# Altium PCB Adapter.PcbDoc
Units mm, origin at the board's own origin, x right, y up, seen from the top; angles counter-clockwise.
Board outline 70 x 70 mm, 2 copper layers (Top Layer, Bottom Layer), stack 0.325 mm thick; 22 components, 21 nets, 126 pads, 0 vias.
Unrouted connection lines stored in the file: 13.
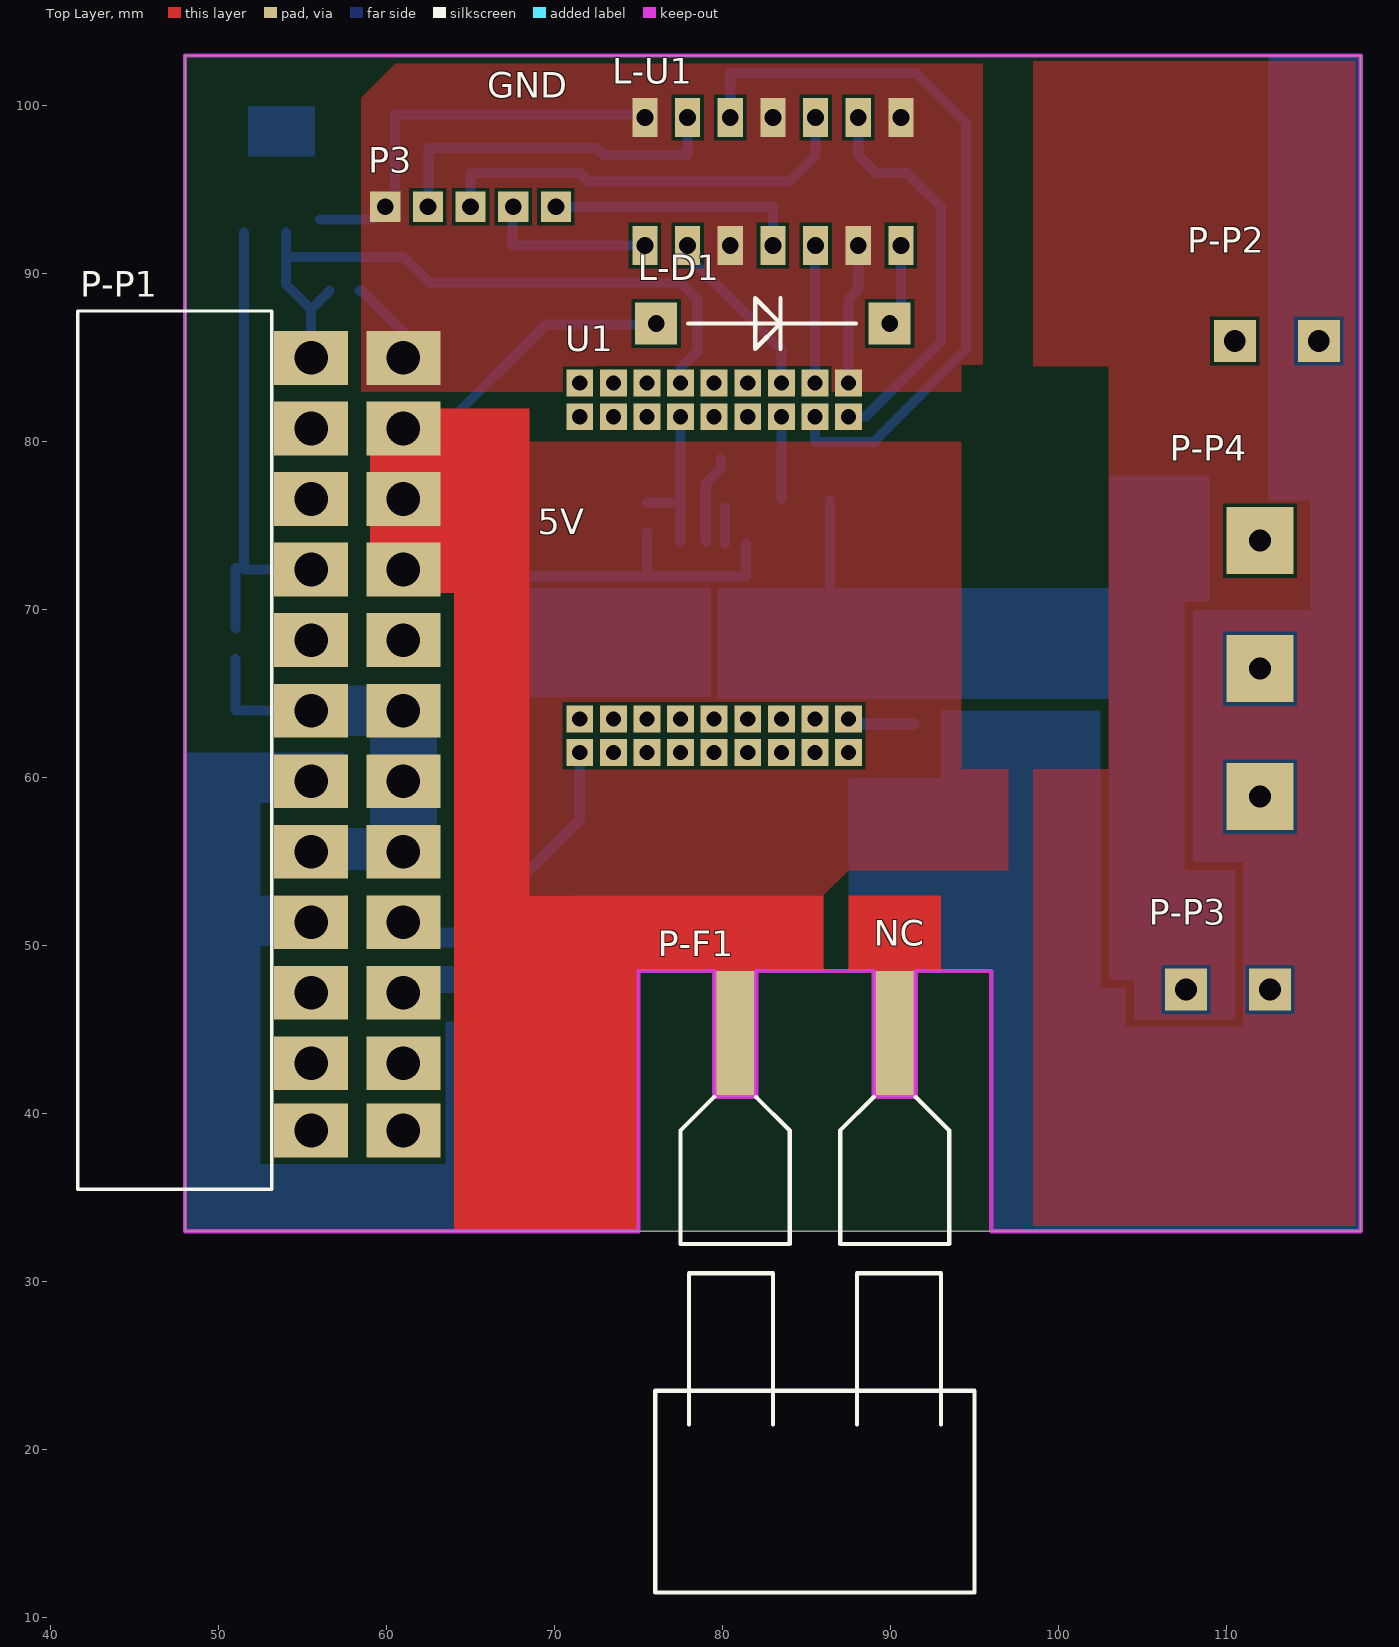
[diagram p0: Top Layer view]
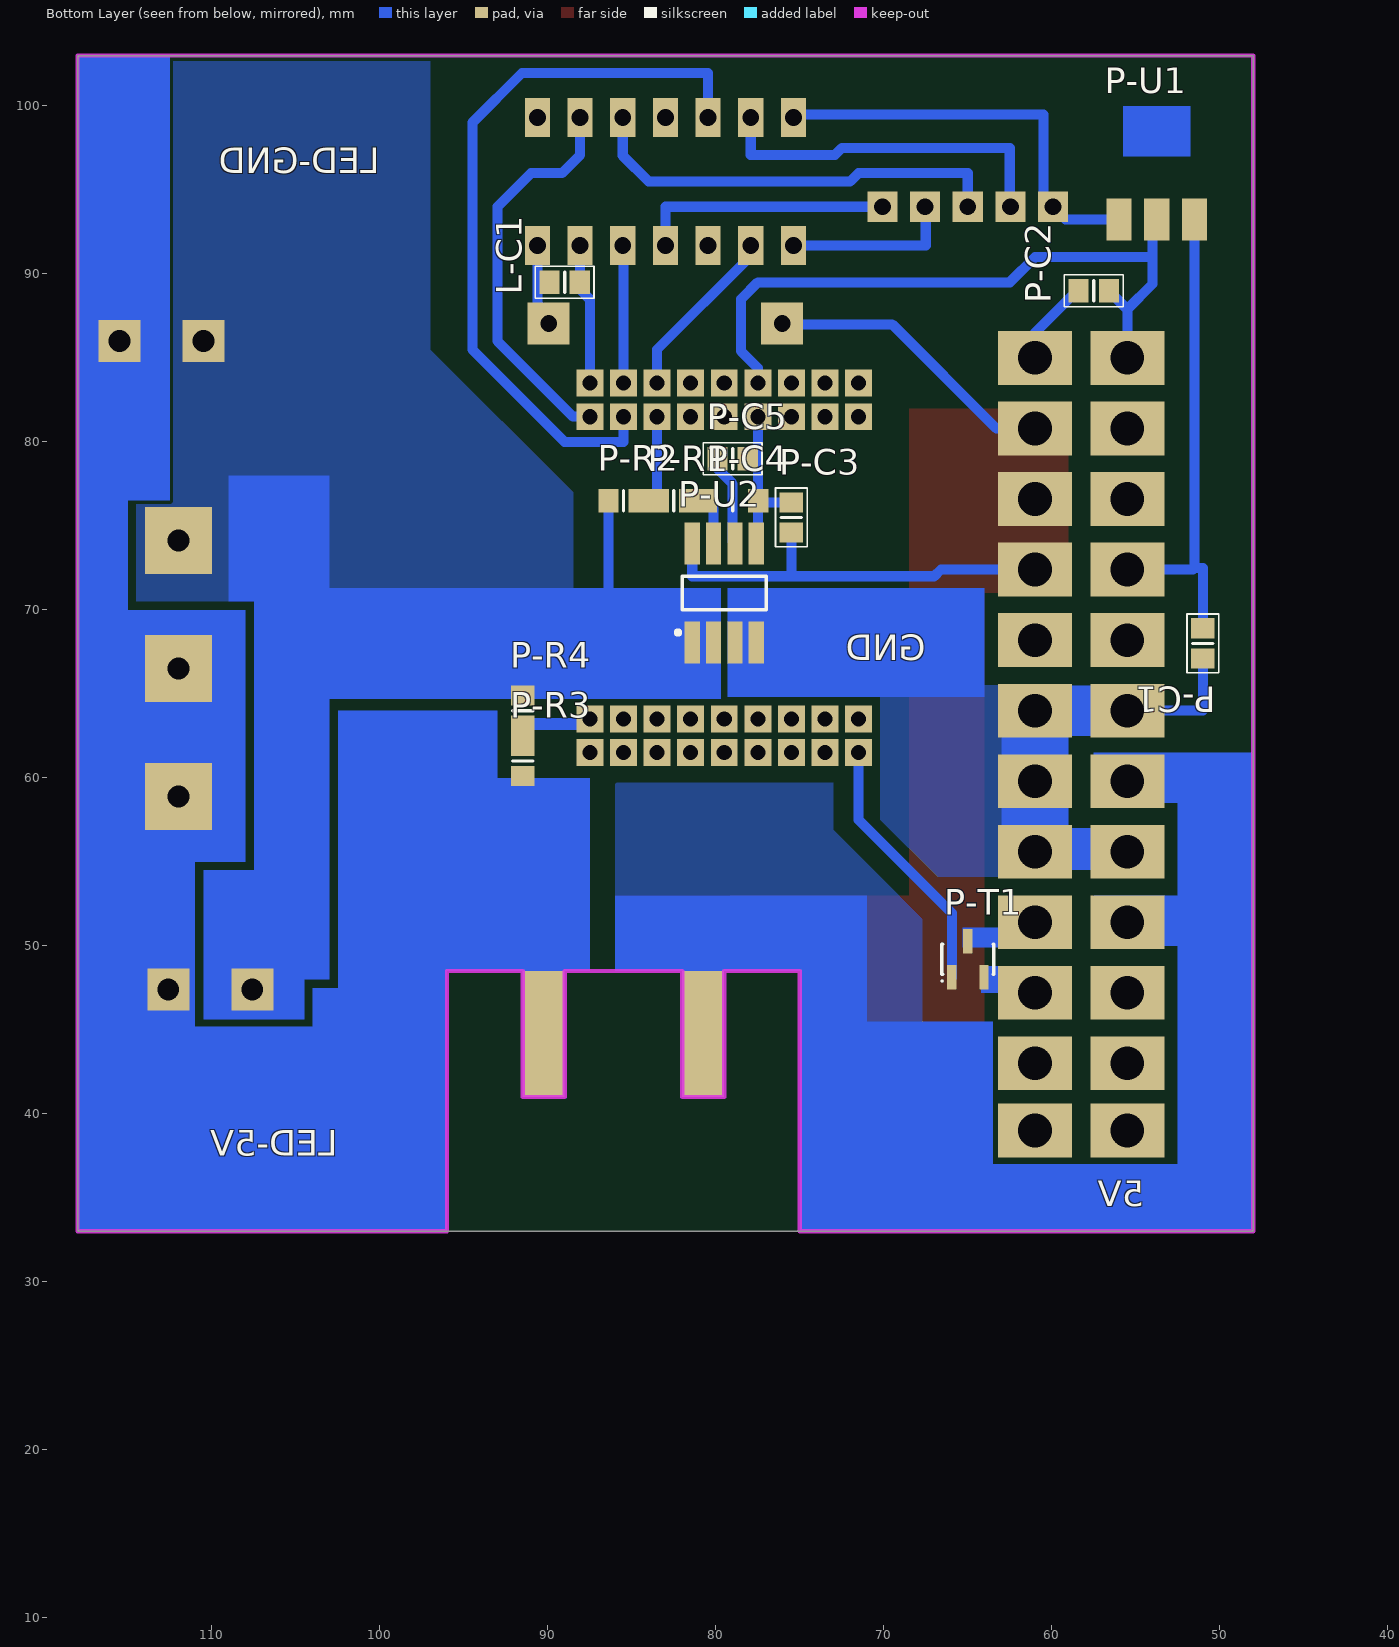
[diagram p1: Bottom Layer view, seen from below]
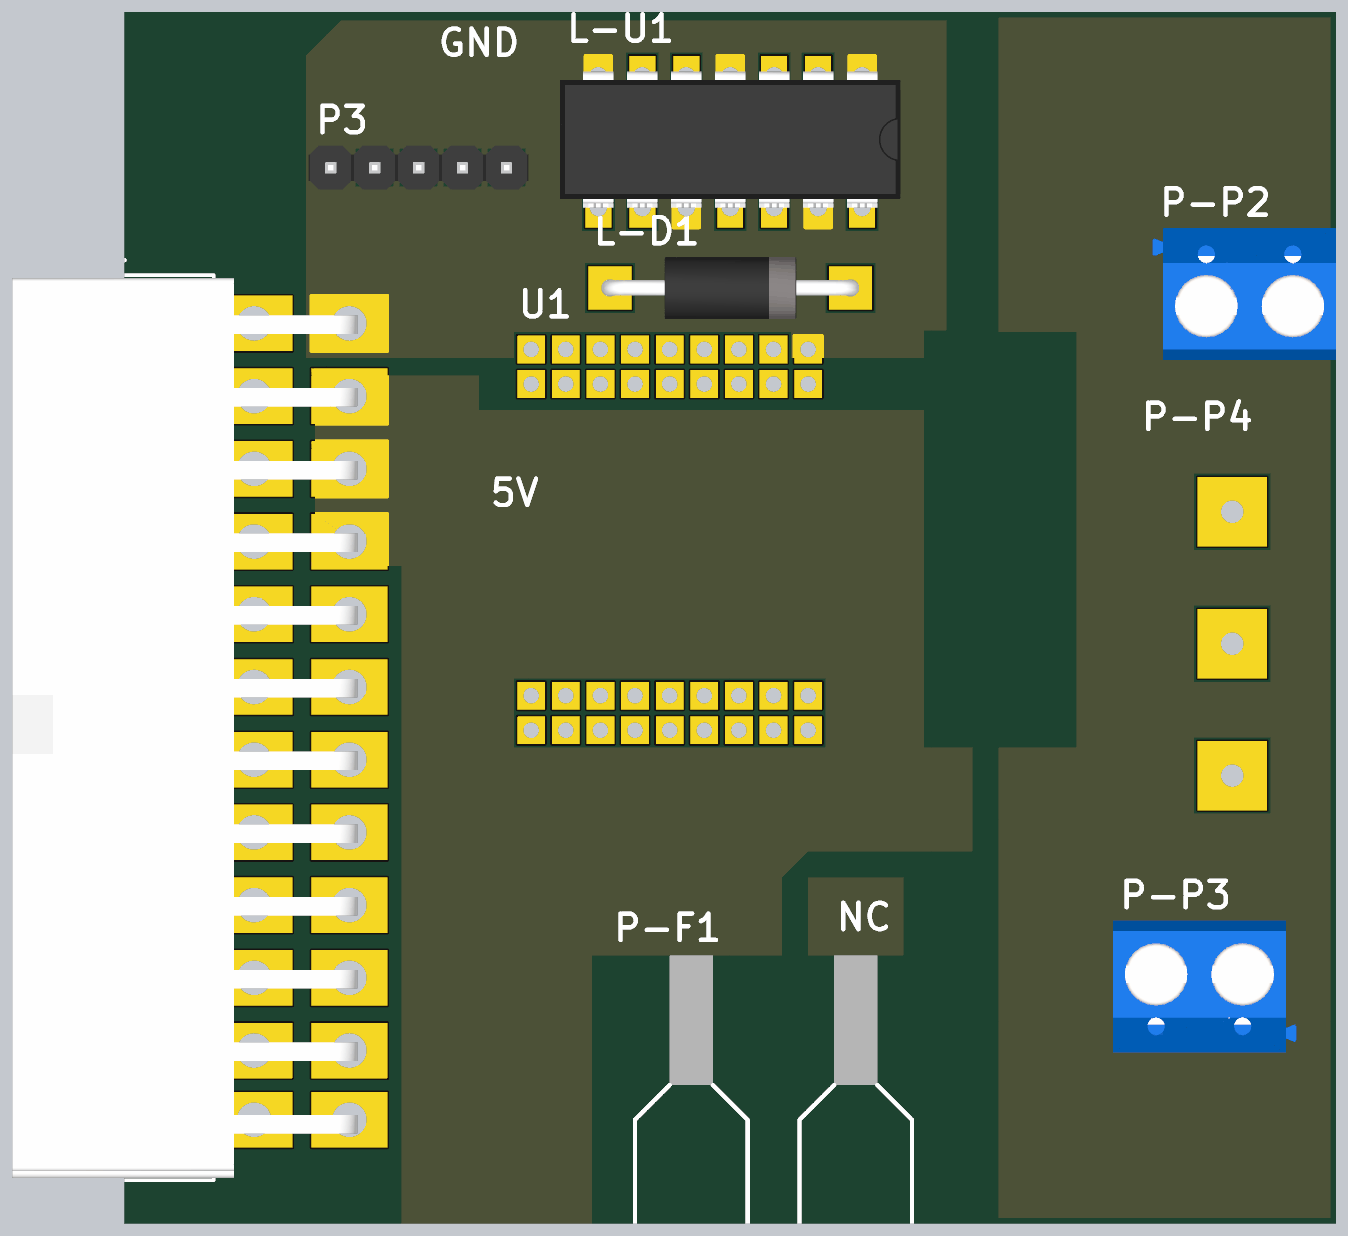
[diagram p2: 3D render of the assembled board from above, using the file's embedded part models]
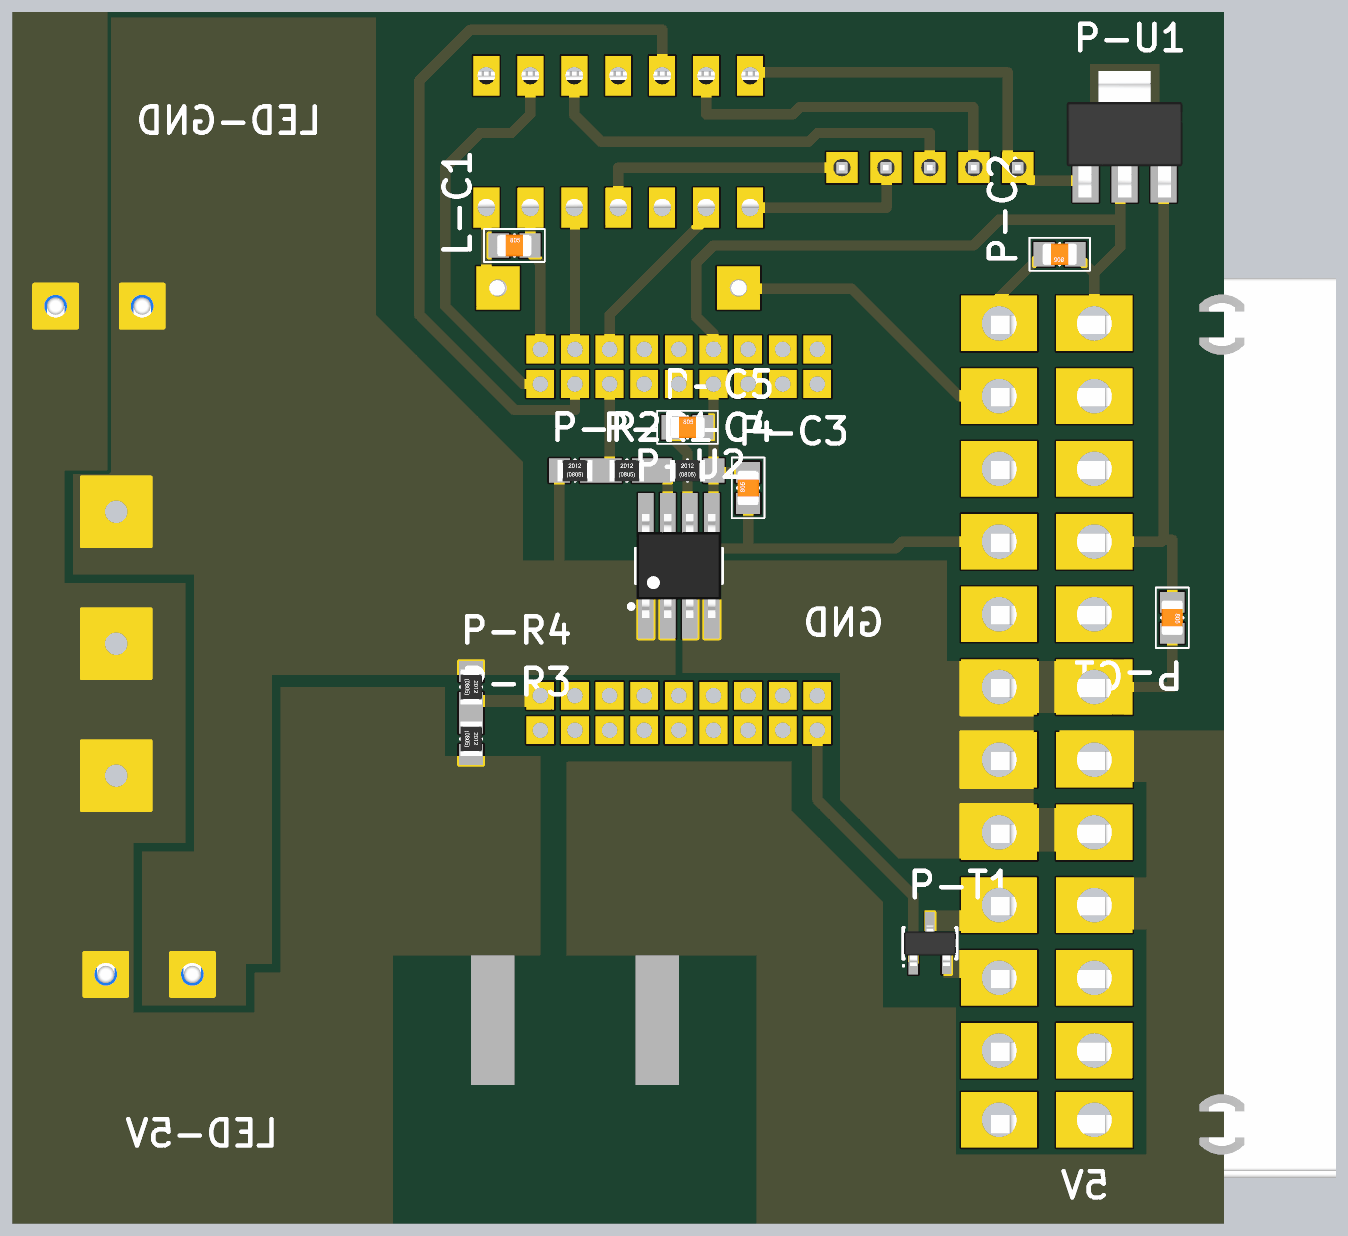
[diagram p3: 3D render of the assembled board from below, using the file's embedded part models]

## Layer stack, top to bottom
Top Layer: signal copper 0.0356
Dielectric 1: core 0.254, FR-4, Dk 4.2
Bottom Layer: signal copper 0.0356

## Board outline
48,33 118,33 118,103 48,103

## Design rules (kind name [scope] priority, off if disabled: settings)
Clearance [All] p1: gap=0.2
PolygonConnect [All] p1: connectstyle=Direct reliefconductorwidth=0.254 reliefentries=4 polygonreliefangle="90 Angle" airgapwidth=0.254
RoutingVias [All] p1: holewidth=0.711 width=1.27 viastyle="Through Hole" minholewidth=0.711 minwidth=1.27 maxholewidth=0.711 maxwidth=1.27
SolderMaskExpansion [All] p1: expansion=0.102
Width [All] p1: maxlimit=2 minlimit=0.2 preferedwidth=0.6
30 further rules are at their usual default settings.

## Classes and differential pairs
component class Top: P3 U1
component class M1: L-C1 L-D1 L-U1
component class P2: P-C1 P-C2 P-C3 P-C4 P-C5 P-F1 P-P1 P-P2 P-P3 P-P4 P-R1 P-R2 P-R3 P-R4 P-T1 P-U1 P-U2 PS-T2

## Components (designator, comment, footprint, x,y, rotation, side; value= is the part's Value field where it differs from the comment)
L-C1 "100nF" "C 0805 / 2012" 89,89.5 r180 bottom
L-D1 "Diode" DO-41 83.5,87 r180 top
L-U1 "SN74LS125" DIP-14 83,95.5 r0 top
P3 "Header 1x5" "Header 1x5 male" 65,94 r180 top
P-C1 "1uF" "C 0805 / 2012" 51,68 r270 bottom
P-C2 "1uF" "C 0805 / 2012" 57.5,89 r0 bottom
P-C3 "1uF" "C 0805 / 2012" 75.5,75.5 r90 bottom
P-C4 "10nF" "R 0805 / 2012 wide" 79,76.5 r180 bottom
P-C5 "10nF" "C 0805 / 2012" 79,79 r180 bottom
P-F1 "Blade fuse" "BLADE FUSE RECEPTACLE" 85.5,48.5 r180 top
P-P1 "ATX" ATX 55.5,85 r270 top
P-P2 "Header 2x1" "Screw terminal 2 pin RM 5mm" 110.5,86 r0 top
P-P3 "Header 2x1" "Screw terminal 2 pin RM 5mm" 112.6,47.4 r180 top
P-P4 "Header 1x3" "Screw terminal 3 pin RM 7.62mm" 112,66.5 r90 top
P-R1 "?R" "R 0805 / 2012" 82.5,76.5 r180 bottom
P-R2 "?R" "R 0805 / 2012" 85.5,76.5 r180 bottom
P-R3 "?R" "R 0805 / 2012" 91.5,61 r270 bottom
P-R4 "?R" "R 0805 / 2012" 91.5,64 r270 bottom
P-T1 "2N7002" SOT-23-3 65,49.2 r180 bottom
P-U1 "AMS1117-3V3" SOT-223-3 57,92.5 r180 bottom
P-U2 "Allegro ACS712-30A" SOIC-8 79.5,71 r90 bottom
U1 "Core51822" Core51822 70.5,84.5 r270 top

## Footprints (in the part's own frame and the unit in brackets; to place one, negate y for a bottom-side part, rotate by r counter-clockwise, add the part's x,y. Pads: shape width x height; smd on the part's side, far side on the other; paste and mask are expansions set on the pad)
ATX [mm] "Molex MINI-FIT JR. 24-polig"
  rect 3.2x4.4 hole 2 paste+0: 1(46,0) 2(42,0) 3(37.8,0) 4(33.6,0) 5(29.4,0) 6(25.2,0) 7(21,0) 8(16.8,0) 9(12.6,0) 10(8.4,0) 11(4.2,0) 12(0,0) 13(46,5.5) 14(42,5.5) 15(37.8,5.5) 16(33.6,5.5) 17(29.4,5.5) 18(25.2,5.5) 19(21,5.5) 20(16.8,5.5) 21(12.6,5.5) 22(8.4,5.5) 23(4.2,5.5) 24(0,5.5)
  silkscreen extent -2.79,-13.9 49.5,-2.34, body extent -2.63,-13.97 49.37,5.96, height 12.4
"BLADE FUSE RECEPTACLE" [mm]
  rect 2.5x7.5 smd mask+0: 1(-4.75,3.75) 2(4.75,3.75)
  rect 2.5x7.5 smd far side mask+0: 1(-4.75,3.75) 2(4.75,3.75)
  Keep-Out Layer lines w0.254: 6,0 6,7.5 3.5,7.5 3.5,0 -3.5,0 -3.5,7.5 -6,7.5 -6,0
  silkscreen extent -9.5,7.5 9.5,37
"C 0805 / 2012" [mm] "Capacitor 0805 / 2012 (2.0 x 1.2 mm)"
  rect 1.2x1.4 smd: 1(-0.9,0) 2(0.9,0)
  silkscreen extent -1.75,-0.95 1.75,0.95, body extent -1,-0.62 1,0.63, height 0.78
Core51822 [mm]
  rect 1.6x1.6 hole 0.9: 1(1,17) 2(3,17) 3(1,15) 4(3,15) 5(1,13) 6(3,13) 7(1,11) 8(3,11) 9(1,9) 10(3,9) 11(1,7) 12(3,7) 13(1,5) 14(3,5) 15(1,3) 16(3,3) 17(1,1) 18(3,1) 19(21,17) 20(23,17) 21(21,15) 22(23,15) 23(21,13) 24(23,13) 25(21,11) 26(23,11) 27(21,9) 28(23,9) 29(21,7) 30(23,7) 31(21,5) 32(23,5) 33(21,3) 34(23,3) 35(21,1) 36(23,1)
DIP-14 [mm]
  rect 1.5x2.3 hole 1: 1(7.62,3.81) 2(5.08,3.81) 3(2.54,3.81) 4(0,3.81) 5(-2.54,3.81) 6(-5.08,3.81) 7(-7.62,3.81) 8(-7.62,-3.81) 9(-5.08,-3.81) 10(-2.54,-3.81) 11(0,-3.81) 12(2.54,-3.81) 13(5.08,-3.81) 14(7.62,-3.81)
  body extent -9.84,-3.81 9.84,4.06, height 5.33
DO-41 [mm]
  rect 2.5x2.5 hole 1: 1(-6.45,-0.05) 2(7.45,-0.05)
  silkscreen extent -4.45,-1.55 5.55,1.45, body extent -6.95,-1.85 7.92,1.75, height 7.99
"Header 1x5 male" [mm] "2.54mm"
  rect 1.8x1.8 hole 1: 1(-5.08,0) 2(-2.54,0) 3(0,0) 4(2.54,0) 5(5.08,0)
  body extent -6.35,-1.27 6.35,1.27, height 8.6
"R 0805 / 2012" [mm] "Resistor 0805 / 2012 (2.0 x 1.2 mm)"
  rect 1.2x1.4 smd: 1(-0.9,0) 2(0.9,0)
  silkscreen extent 0,-0.6 0,0.6, body extent -1,-0.63 1,0.62, height 0.45
"R 0805 / 2012 wide" [mm] "Resistor 0805 / 2012 (2.0 x 1.2 mm)"
  rect 1.2x1.4 smd: 1(-1.524,0) 2(1.524,0)
  silkscreen extent 0,-0.6 0,0.6, body extent -1,-0.63 1,0.62, height 0.45
"Screw terminal 2 pin RM 5mm" [mm] "DG301-5.0-02"
  rect 2.5x2.5 hole 1.3: 1(0,0) 2(5,0)
  body extent -3.1,-3.1 7.5,4.5, height 10
"Screw terminal 3 pin RM 7.62mm" [mm]
  rect 4x4 hole 1.3: 1(-7.62,0) 2(0,0) 3(7.62,0)
SOIC-8 [mm]
  rect 2.5x0.9 smd: 1(-2.95,1.905) 2(-2.95,0.635) 3(-2.95,-0.635) 4(-2.95,-1.905) 5(2.95,-1.905) 6(2.95,-0.635) 7(2.95,0.635) 8(2.95,1.905)
  silkscreen extent -2.47,-2.5 1,2.88, body extent -3,-2.45 3,2.45, height 1.75
SOT-23-3 [mm]
  rect 0.55x1.45 smd: 1(-0.95,-1.075) 2(0.965,-1.067) 3(0,1.067)
  silkscreen extent -1.58,-1.35 1.55,0.9, body extent -1.49,-1.32 1.51,1.28, height 1.1
SOT-223-3 [mm]
  rect 1.5x2.5 smd: 1(1,0.75) 2(3.25,0.75) 3(5.5,0.75)
  Top Layer region: 1.25,7.5 5.25,7.5 5.25,4.5 1.25,4.5
  body extent -0.1,-0.22 6.6,7.08, height 1.8

## Part data
L-C1 P-C1 P-C2 P-C3 P-C4 P-C5: library part Capacitor
L-U1: library part 74xx125, "Quad 3-State Buffers"
P-F1: library part Fuse
P-P1: library part "ATX sorted"
P-R1 P-R2 P-R3 P-R4: library part Resistor
P-T1: "N-FET"
P-U1: library part AMS1117, "LDO 3.3V/5V/12V"
P-U2: library part "Allegro ACS712", "Analog current sensor"

## Nets (pads, with @x,y where several pads share a name; then routed paths per layer and width w, separated by ;. In a path a pad name is that pad's centre, name@x,y a point inside that pad or via, vN(x,y) a via of type N, cw(c..) or ccw(c..) an arc to the next point about the centre after c; other vN are vias at no path point)
3V3: P-C2.1 P-P1.1 P-P1.2 P-P1.12 P-P1.13 P-U1.2 U1.11 | length 40.6
  Bottom Layer w0.6: P-U1.2@54,92.5 54,91 ; P-P1.12 55.5,87.9 ; P-C2.1 55.5,87.9 ; U1.11 77.5,84.4 78.5,85.4 78.5,88.5 77.5,89.5 62.5,89.5 61,91 54,91 ; 54,91 54,89.4 55.5,87.9
4V3: L-C1.1 L-D1.1 L-U1.14 | length 4.3
  Bottom Layer w0.6: L-D1.1@90,87.6 90.62,88.22 L-U1.14
5V: L-D1.2 P-C3.1 P-F1.2 P-P1.4 P-P1.6 P-P1.21 P-P1.22 P-P1.23 P-U2.8 | length 42.7
  Bottom Layer w0.6: P-P1.21 66.6,72.4 67,72 81.405,72 P-U2.8 ; P-P1.23 63.3,80.8 69.5,87 L-D1.2@76,87 ; 75.5,72 P-C3.1
5V-STANDBY: P-C1.1 P-P1.9 P-U1.3 | length 28.1
  Bottom Layer w0.6: P-C1.1 51,72.5 51.5,72.5 ; P-U1.3@51.5,92.5 51.5,72.5 ; P-P1.9 51.6,72.4 51.5,72.5
"ATX ON": P-T1.1 U1.36 | length 15.7
  Bottom Layer w0.6: P-T1.1 65.95,51.95 71.5,57.5 U1.36
"CURRENT SENSOR": P-R1.1 P-R2.2 U1.6 | length 4.9
  Bottom Layer w0.6: P-R1.1@83.5,76.6 U1.6
DATA1: L-U1.2 U1.2 | length 23.8
  Bottom Layer w0.6: U1.2 88.5,81.5 93,86 93,94 91,96 89.16,96 88.08,97.08 L-U1.2
DATA1_5V: L-U1.3 P3.3 | length 25.7
  Bottom Layer w0.6: P3.3 65,96 71.5,96 72,95.5 84,95.5 85.54,97.04 L-U1.3
DATA2: L-U1.5 U1.4 | length 44.2
  Bottom Layer w0.6: L-U1.5 80.46,101.96 91.54,101.96 94.5,99 94.5,85.5 89,80 85.5,80 U1.4
DATA2_5V: L-U1.6 P3.4 | length 21.3
  Bottom Layer w0.6: P3.4@62.5,94.04 62.5,97.5 72.5,97.5 72.92,97.08 77.92,97.08 L-U1.6
DATA3: L-U1.9 U1.5 | length 10.4
  Bottom Layer w0.6: L-U1.9@78,91.61 78,91 83.5,85.5 U1.5
DATA3_5V: L-U1.8 P3.2 | length 10.2
  Bottom Layer w0.6: P3.2@67.5,93.96 67.5,91.69 L-U1.8
DATA4: L-U1.12 U1.3 | length 8.1
  Bottom Layer w0.6: U1.3 L-U1.12@85.5,91.65
DATA4_5V: L-U1.11 P3.1 | length 15.2
  Bottom Layer w0.6: P3.1 83,94 L-U1.11
"FUSE OK": P-R3.1 P-R4.2 U1.19 | length 3.9
  Bottom Layer w0.7: U1.19@87.5,63.2 P-R4.2@91.4,63.2
GND: L-C1.2 L-U1.1 L-U1.4 L-U1.7 L-U1.10 L-U1.13 P3.5 P-C1.2 P-C2.2 P-C3.2 P-C4.2 P-C5.2 P-P1.3 P-P1.5 P-P1.7 P-P1.15 P-P1.17 P-P1.18 P-P1.19 P-P1.24 P-T1.2 P-U1.1 P-U2.3 P-U2.4 P-U2.5 U1.1 U1.12 | length 53.7
  Bottom Layer w0.6: P-C1.2 51,64 P-P1.7 ; P-U1.1 59.17,93.25 60.5,94.58 60.5,99.5 L-U1.7@75.19,99.5 ; P-C2.2 58.5,89 P-P1.24@61,86.5 ; P-C3.2 P-C4.2@77.4,76.4 ; P-U2.5@77.5,74.045 U1.12 ; U1.1 87.5,88.5 88.08,89.08 L-U1.13
LED-5V: P-F1.1 P-P2.2 P-P3.1 P-P4.1 P-P4.2 P-R3.2
LED-GND: P-P2.1 P-P3.2 P-P4.3 P-R2.1 P-R4.1 P-U2.1 P-U2.2 | length 6.4
  Bottom Layer w0.6: 86.4,70.1 P-R2.1
NetP-C4_1: P-C4.1 P-R1.2 P-U2.7 | length 2.2
  Bottom Layer w0.6: P-U2.7 P-C4.1@80.135,76.111
NetP-C5_1: P-C5.1 P-U2.6 | length 5.3
  Bottom Layer w0.6: P-U2.6@79,74.085 79,77.5 79.9,78.4 P-C5.1
PS_ON: P-P1.16 P-T1.3
pads on no net: P-P1.8 P-P1.10 P-P1.11 P-P1.14 P-P1.20 U1.7 U1.8 U1.9 U1.10 U1.13 U1.14 U1.15 U1.16 U1.17 U1.18 U1.20 U1.21 U1.22 U1.23 U1.24 U1.25 U1.26 U1.27 U1.28 U1.29 U1.30 U1.31 U1.32 U1.33 U1.34 U1.35

## Polygon pours and split planes (outlines as drawn)
GND on Top Layer "GND Plane" (solid, pour order 0): 58.5,83 58.5,96 58.5,100.5 60.5,102.5 95,102.5 95.5,102.5 95.5,84.6 94.2,84.6 94.2,83
no net on Top Layer "Top Layer-No Net" (solid, pour order 7): 98.5,103 98.5,84.5 103,84.5 103,60.5 98.5,60.5 98.5,33 118,33 118,103
5V on Top Layer "Top Layer-No Net" (solid, pour order 9): 68.5,80 94.2,80 94.2,60.5 97,60.5 97,54.5 87.5,54.5 86,53 68.5,53
LED-GND on Bottom Layer "Top Layer-No Net" (solid, pour order 6): 88.5,70.5 88.5,77 97,85.5 97,103 114.5,103 114.5,70.5
GND on Bottom Layer "Top Layer-No Net" (solid, pour order 11): 63,65.5 70.2,65.5 70.2,58 70.2,57.5 66.8,54.1 62.3,54.1
5V on Bottom Layer "Top Layer-No Net" (solid, pour order 13): 67.7,45.3 67.7,51.6 72.9,56.8 73,56.9 73,59.7 85.9,59.7 86,59.8 86,53 79.2,53 71.5,45.3

## Keep-outs
Keep-Out Layer:
  lines w0.254: 79.5,48.5 75,48.5 75,33 48,33 48,103 118,103 118,33 96,33 96,48.5 91.5,48.5

## Other copper
Top Layer:
  rectangle net LED-5V: 87.5,48.5 93,53
  rectangle net 5V: 59,71 68.5,82
  rectangle net 5V: 64,48.5 68.5,71
  rectangle net 5V: 68,48.5 86,53
  rectangle net 5V: 64,33 75,48.5
Bottom Layer:
  rectangle net LED-GND: 103,48 107.5,70.5
  rectangle net LED-5V: 96,47 102.5,64
  rectangle net 5V: 50.5,58.5 57.5,61.5
  rectangle net 5V: 51,50 57.5,53
  rectangle net 5V: 75,48.5 86,53
  rectangle: 52.5,33 75,37
  rectangle: 48,33 52.5,61.5
  rectangle net GND: 53.5,62.5 62,65.5
  rectangle net LED-5V: 96,33 112,45.2
  rectangle net LED-5V: 96,36 104,47.5
  rectangle net GND: 59,54.5 63,65.5
  rectangle net GND: 53.5,54.5 60,57
  rectangle net GND: 64,64.8 79.3,71.3
  rectangle net LED-GND: 79.7,64.7 105,71.3
  rectangle net LED-5V: 108,55 115.5,70
  rectangle net LED-5V: 111,33 115,55.5
  rectangle net LED-5V: 87.5,48.5 96.5,60
  rectangle net LED-GND: 103,70.5 109,78
  rectangle net LED-GND: 104.5,45.6 110.5,54.5
  rectangle net LED-GND: 104.5,54 107.5,63.5
  rectangle net LED-5V: 115,33 118,103
  rectangle net LED-5V: 93,60 96,64
  rectangle net PS_ON: 62.4,49.9 65.3,51.1
  rectangle net GND: 62.8,47.2 64.2,48.8
  rectangle net 5V: 71,43 75,53
  rectangle net 5V: 63.5,36.5 75,45.5
  rectangle net LED-5V: 112.5,76.5 118,103

## Silkscreen, mask and mechanical layers (free items; w line width, h text height)
Top Overlay:
  text "GND" at 66,100.5 h1.52
  text "5V" at 69,74.5 h1.52
  text "NC" at 89,50 h1.52
Bottom Overlay:
  text "LED-GND" at 100,96 h1.52
  text "GND" at 67.5,67 h1.52
  text "LED-5V" at 102.5,37.5 h1.52
  text "5V" at 54.5,34.5 h1.52